# EAGLE board untitled_outline (EAGLE 6.3)
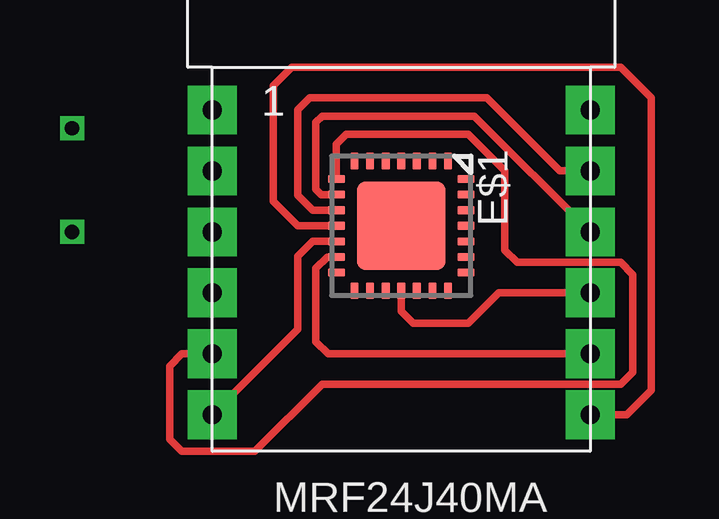
[diagram p0: board, top side]
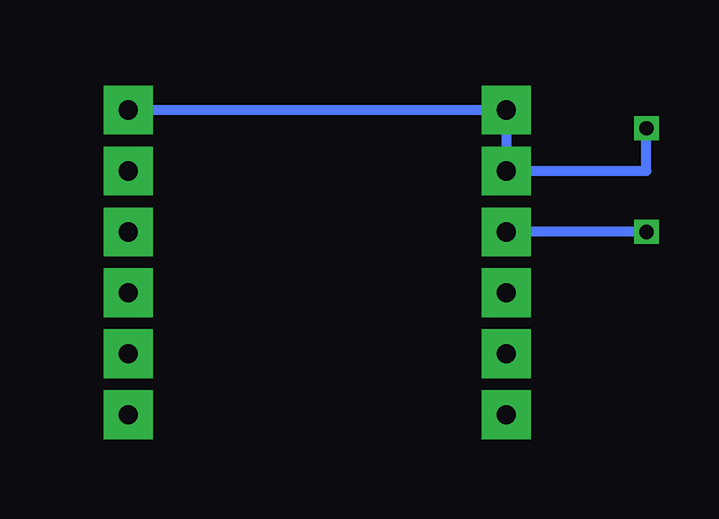
[diagram p1: board, bottom side, seen from below]

No outline drawn. Coordinates in mm, seen from the top.
Copper layers (1*16): Top 0.035mm / dielectric 1.5mm / Bottom 0.035mm
Design rules "default": minimum track width 10mil, minimum drill 24mil, track to track 8mil, track to pad 8mil, pad to pad 8mil, via to via 8mil, smd to smd 8mil, copper to edge 40mil, drill to drill 8mil, minimum pad ring 10mil, minimum via ring 8mil, stop-mask expansion 4mil, vias tented up to drill 0mil, thermal gap 10mil

## Footprints (pad centres in the part's own frame; a part is rotated, then mirrored left to right if it is on the bottom)
QFN28-ML_6X6MM = smd 0.7 x 0.35: 1 -2.7,1.95; 2 -2.7,1.3; 3 -2.7,0.65; 4 -2.7,0; 5 -2.7,-0.65; 6 -2.7,-1.3; 7 -2.7,-1.95; 15 2.7,-1.95; 16 2.7,-1.3; 17 2.7,-0.65; 18 2.7,0; 19 2.7,0.65; 20 2.7,1.3; 21 2.7,1.95 | smd 0.35 x 0.7: 8 -1.95,-2.7; 9 -1.3,-2.7; 10 -0.65,-2.7; 11 0,-2.7; 12 0.65,-2.7; 13 1.3,-2.7; 14 1.95,-2.7; 22 1.95,2.7; 23 1.3,2.7; 24 0.65,2.7; 25 0,2.7; 26 -0.65,2.7; 27 -1.3,2.7; 28 -1.95,2.7 | smd 3.7 x 3.7: EXP 0,0
MRF24J40MA = drill 0.8 pad 2.032 square: CS(LOW) 15.748,4.064; GND 0,14.224; GND1 15.748,11.684; GND2 15.748,14.224; INT 0,6.604; NC 15.748,6.604; RESET 0,11.684; SCK 0,1.524; SDI 0,4.064; SDO 15.748,1.524; VIN 15.748,9.144; WAKE 0,9.144

## Placement (x,y rotation side)
E$1  [QFN28-ML_6X6MM]  14.22,15.75 270 top
E$2  [MRF24J40MA]  6.35,6.35 0 top

## Library data of the parts
E$1 = microchip-6
E$2 = MRF24J40MA

## Nets
S$1: E$1.11 E$2.SDO
S$2: E$1.12 E$2.SCK
S$3: E$1.13 E$2.CS(LOW)
S$4: E$1.8 E$2.SDI
S$5: E$1.18 E$2.NC
S$6: E$1.9 E$2.VIN
S$7: E$1.10 E$2.GND1
S$9: E$2.WAKE
S$10: E$2.GND2 E$2.RESET

## Tracks (layer width: path | path; a pad name or v marks a point on that pad's centre or on a via)
S$1
  Top 0.305: E$1.11 9.91,15.75 8.89,16.76 8.89,21.59 9.65,22.35 23.37,22.35 24.64,21.08 24.64,8.89 23.62,7.87 E$2.SDO
S$2
  Top 0.305: E$1.12 10.53,15.1 9.91,14.48 9.91,11.43 E$2.SCK
S$3
  Top 0.305: E$1.13 11.15,14.45 10.67,13.97 10.67,10.92 11.18,10.41 E$2.CS(LOW)
S$4
  Top 0.305: E$1.8 11.52,19.14 11.94,19.56 17.02,19.56 18.54,18.03 18.54,14.73 19.05,14.22 23.37,14.22 23.88,13.72 23.88,9.65 23.37,9.14 10.92,9.14 8.13,6.35 5.08,6.35 4.57,6.86 4.57,9.91 5.08,10.41 E$2.SDI
S$5
  Top 0.305: E$2.NC 18.29,12.95 17.02,11.68 14.73,11.68 14.22,12.19 E$1.18
S$6
  Top 0.305: E$1.9 10.89,17.05 10.67,17.27 10.67,20.07 10.92,20.32 17.27,20.32 E$2.VIN
S$7
  Top 0.305: E$1.10 10.53,16.4 9.91,17.02 9.91,20.57 10.41,21.08 17.78,21.08 20.83,18.03 E$2.GND1
S$9  (via drill 0.6)
  Bottom 0.406: v0.51,15.49 E$2.WAKE
S$10  (via drill 0.6)
  Bottom 0.406: E$2.GND2 6.35,20.57 E$2.RESET 0.51,18.03 v0.51,19.81